# Altium PCB PATTERN-GENERATOR-NODE-PCB.PcbDoc (part 2 of 2)
Units mm, origin at the board's own origin, x right, y up, seen from the top; angles counter-clockwise.
Board outline 100.5 x 100.5 mm, 2 copper layers (Top Layer, Bottom Layer), stack 1.771 mm thick; 68 components, 36 nets, 239 pads, 2205 vias.
Unrouted connection lines stored in the file: 2.
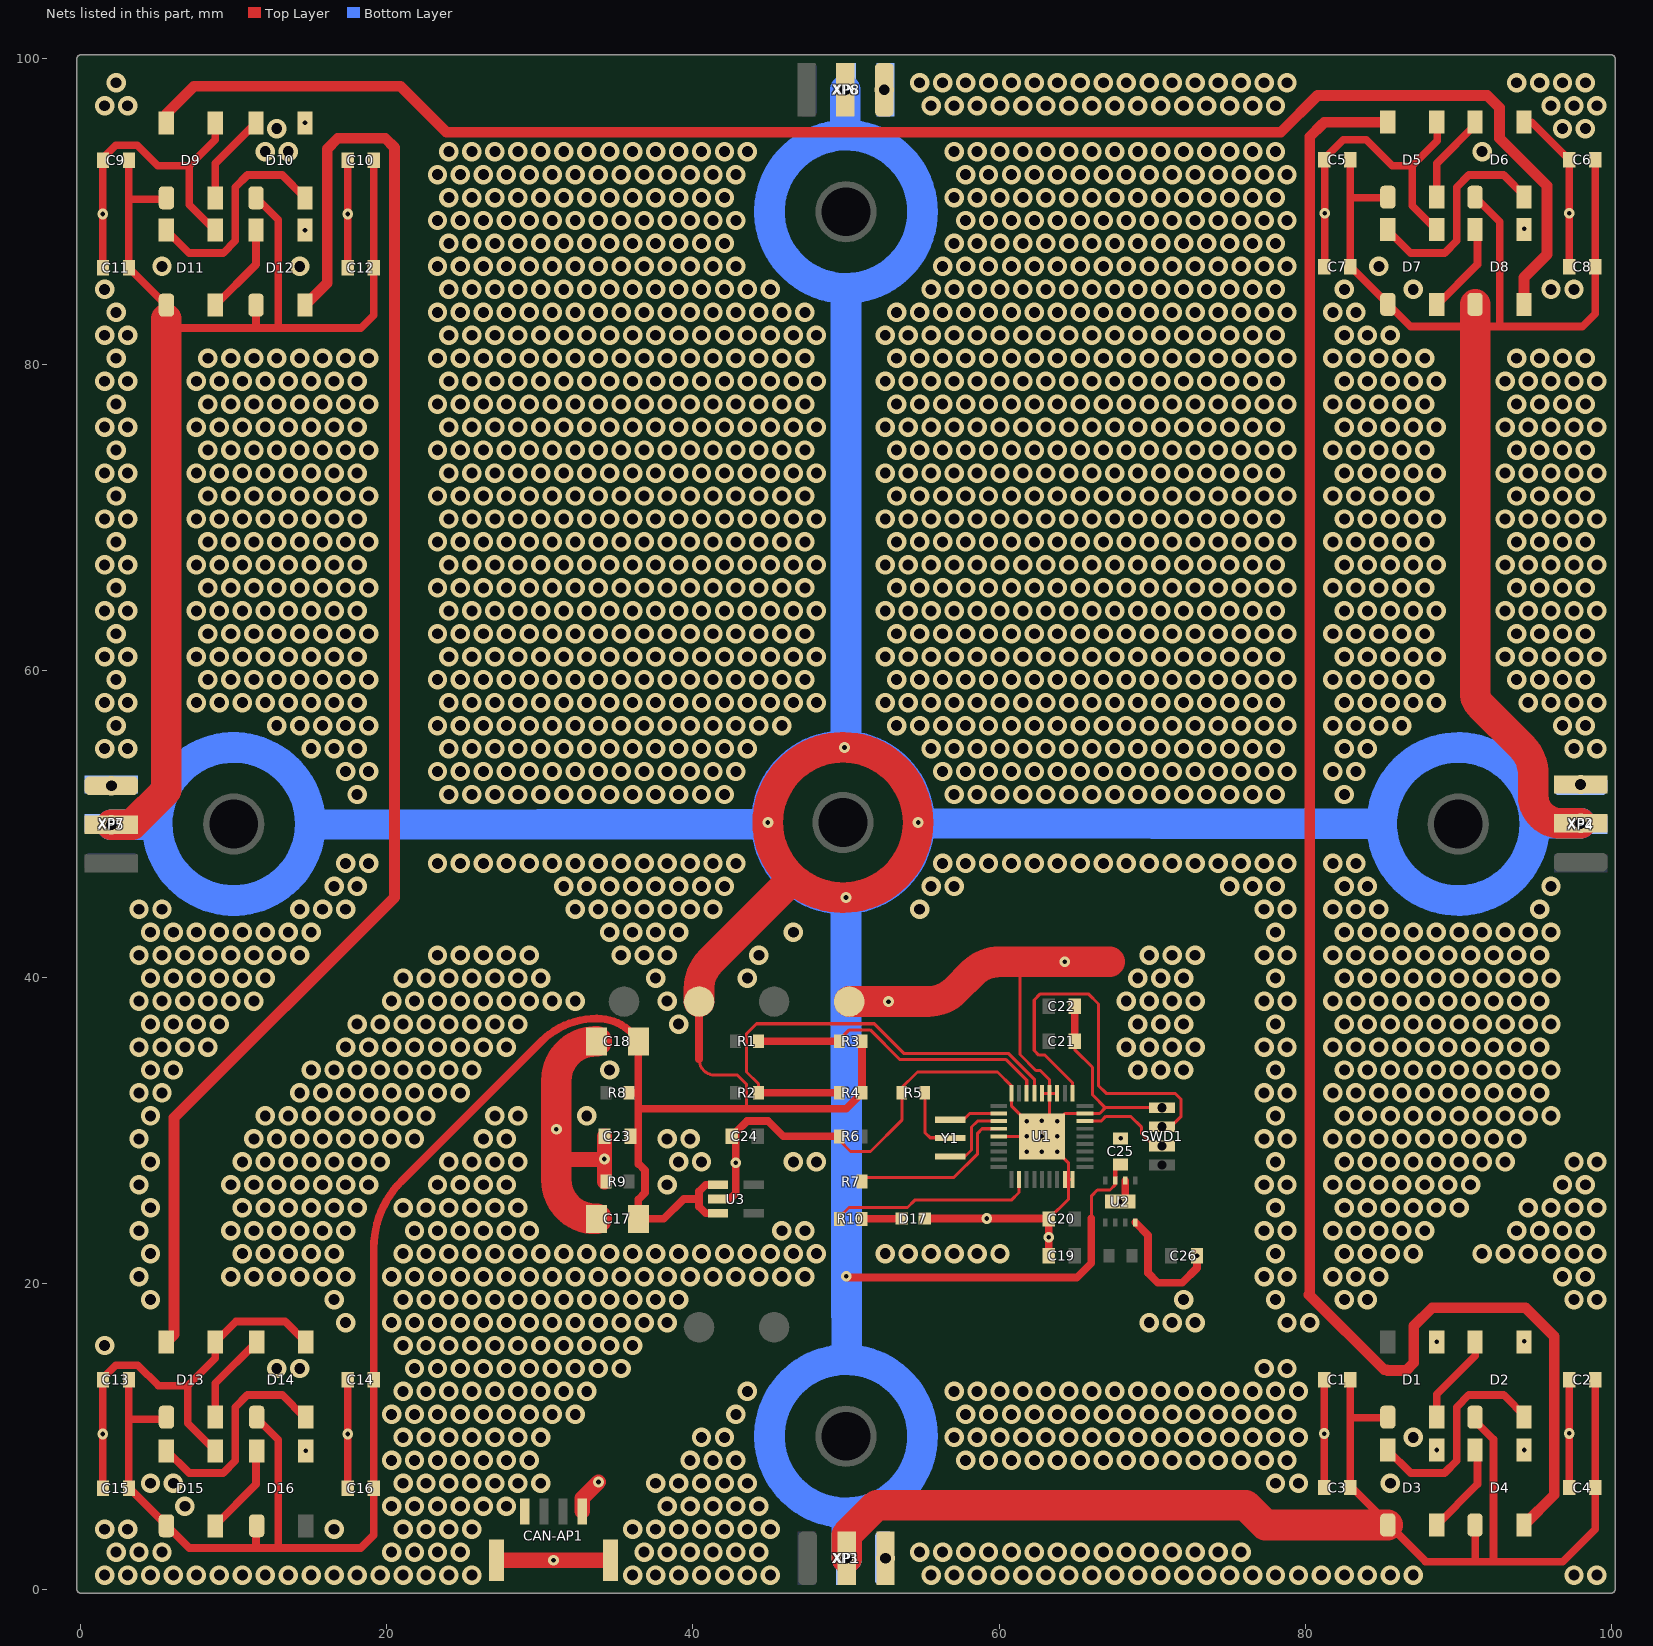
[diagram p2: the nets of this part, all layers, seen from the top]

## Via types
v1: diameter 1.27, hole 0.711, Top Layer to Bottom Layer, tented both sides, 2151 vias
v2: diameter 0.7, hole 0.3, Top Layer to Bottom Layer, tented top, 42 vias
v3: diameter 1.27, hole 0.711, Top Layer to Bottom Layer, tented top, 12 vias

## Nets (pads, with @x,y where several pads share a name; then routed paths per layer and width w, separated by ;. In a path a pad name is that pad's centre, name@x,y a point inside that pad or via, vN(x,y) a via of type N, cw(c..) or ccw(c..) an arc to the next point about the centre after c; other vN are vias at no path point) (continued)
GND: C1.2 C2.2 C3.2 C4.2 C5.2 C6.2 C7.2 C8.2 C9.2 C10.2 C11.2 C12.2 C13.2 C14.2 C15.2 C16.2 C17.1 C18.1 C19.2 C20.2 C21.2 C22.2 C23.2 C24.2 C25.2 C26.2 CAN-AP1.4 CAN-AP1.SH1 CAN-AP1.SH2 D1.3 D2.3 D3.3 D4.3 D5.3 D6.3 D7.3 D8.3 D9.3 D10.3 D11.3 D12.3 D13.3 D14.3 D15.3 D16.3 D17.C pad.9 R5.1 R6.1 R9.1 SWD1.1 U1. U1.5 U1.17 U1.18 U1.26 U1.30 U1.31 U1.32 U1.36 U2.2 U2.8 U2.P$9 U3.2 XP1.3 XP2.3 XP3.1 XP4.1 XP5.1 XP6.1 XP7.3 XP8.3 | length 253.3
  Top Layer w0.2: R6.1@49.55,29.59 49.55,29.35 50.3,28.6 51.6,28.6 53.65,30.65 R5.1@53.65,32.44 ; R5.1@53.529,32.661 54.668,33.8 59.9,33.8 U1.36@60.828,32.872 ; U1.5@59.985,29.59 v2(62.8,29.59) ; U1.36@60.825,32.405 60.825,31.565 v2(62.8,29.59) ; 61.364,41 61.364,34.936 62.4,33.9 62.7,33.9 63.3,33.3 U1.31@63.3,32.405 ; U1.32@62.8,32.405 U1.31@63.3,32.405 ; C20.2@63.25,24.2 64.55,25.5 64.55,26.775 ; U1.30@63.8,32.405 U1.31@63.3,32.405 ; U1.17@64.3,26.775 64.55,26.775 ; U1.18@64.8,26.775 64.55,26.775 ; C21.2@64.95,35.8 64.95,35.25 66.1,34.1 66.1,32.313 66.945,31.468 ; 66.848,31.468 70.647,31.468 SWD1.1@70.65,31.465 ; 66.946,31.468 66.568,31.09 U1.26@65.615,31.09 64.3,31.09 v2(63.8,30.59) U1.@63.3,30.09 ; v2(62.8,29.59) 64.55,27.84 64.55,26.775 ; v2(62.8,29.59) U1.@63.3,30.09 ; U1.@63.3,30.09 U1.31@63.3,32.405
  Top Layer w0.5: C15.2@1.45,6.6 v2(1.45,10.15) C13.2@1.45,13.7 1.45,13.8 2.3,14.65 3.736,14.65 5.086,13.3 7,13.3 ; C11.2@1.45,86.3 C11.2@1.45,86.35 C9.2@1.45,93.356 1.45,93.5 2.3,94.35 3.693,94.35 5.043,93 7.1,93 ; D15.3@8.8,9.05 7,10.85 7,13.3 ; D11.3@8.8,88.75 7.1,90.45 7.1,93 ; D9.3@8.8,95.85 D9.3@8.8,95.806 8.8,94.7 7.1,93 ; D14.3@14.7,16.15 13.35,17.5 10.15,17.5 D13.3@8.8,16.15 8.8,15.1 7,13.3 ; C16.2@17.45,6.6 v2(17.45,10.15) C14.2@17.45,13.7 ; C12.2@17.45,86.35 C10.2@17.45,93.356 ; U3.2@41.632,25.5 42.415,25.5 42.8,25.885 42.8,29.861 43.532,30.593 44.907,30.593 45.91,29.59 R6.1@49.55,29.59 ; D17.C@55.15,24.224 63.226,24.224 C20.2@63.25,24.2 v2(63.25,23) C19.2@63.25,21.8 ; C21.2@64.95,35.8 C22.2@64.95,38.1 ; v2(67.92,25.334) 68.245,25.659 U2.2@68.245,26.697 ; U2.8@68.895,23.972 69.73,23.137 69.73,20.67 70.37,20.03 71.97,20.03 72.932,20.992 v2(72.932,21.8) ; C3.2@81.25,6.65 v2(81.25,10.175) C1.2@81.25,13.7 ; C7.2@81.283,86.302 81.283,93.502 82.481,94.7 84,94.7 85.7,93 87,93 ; D7.3@88.633,88.752 87,90.385 87,93 ; D5.3@88.633,95.852 88.633,94.633 87,93 ; D6.3@94.3,95.85 94.8,95.85 C6.2@97.25,93.4 v2(97.25,89.9) C8.2@97.25,86.4 ; C2.2@97.249,13.714 v2(97.249,10.187) 97.249,6.659 C4.2@97.26,6.649
  Top Layer w1: CAN-AP1.SH1@27.165,1.895 CAN-AP1.SH2@34.615,1.895 CAN-AP1.SH2@34.615,2.193 ; 31.08,28.08 34.186,28.08 ccw(c34.186,28.113) v2(34.219,28.113) ; CAN-AP1.4@32.765,5.095 32.765,5.945 v2(33.83,7.01) ; C23.2@34.219,29.59 v2(34.219,28.113) ; R9.1@34.222,26.637 34.219,26.637 v2(34.219,28.113)
  Top Layer w2: C17.1@33.7,24.2 33.62,24.2 cw(c33.62,26.74) 31.08,26.74 31.08,28.08 31.08,33.26 cw(c33.62,33.26) 33.62,35.8 C18.1@33.7,35.8 ; pad.9@50.21,38.4 v2(52.779,38.4) 55.348,38.4 ccw(c55.348,40.94) 57.144,39.144 58.256,40.256 cw(c60.052,38.46) 60.052,41 61.364,41 67.22,41
  other v1: 1.561,0.928 3.061,0.928 4.561,0.928 6.061,0.928 7.561,0.928 9.061,0.928 10.561,0.928 12.061,0.928 13.561,0.928 15.061,0.928 16.561,0.928 18.061,0.928 19.561,0.928 21.061,0.928 22.561,0.928 24.061,0.928 25.561,0.928 36.061,0.928 37.561,0.928 39.061,0.928 40.561,0.928 42.061,0.928 43.561,0.928 45.061,0.928 55.561,0.928 57.061,0.928 58.561,0.928 60.061,0.928 61.561,0.928 63.061,0.928 64.561,0.928 66.061,0.928 67.561,0.928 69.061,0.928 70.561,0.928 72.061,0.928 73.561,0.928 75.061,0.928 76.561,0.928 78.061,0.928 79.561,0.928 81.061,0.928 82.561,0.928 84.061,0.928 85.561,0.928 87.061,0.928 97.561,0.928 99.061,0.928 2.311,2.428 3.811,2.428 5.311,2.428 20.311,2.428 21.811,2.428 23.311,2.428 24.811,2.428 36.811,2.428 38.311,2.428 39.811,2.428 41.311,2.428 42.811,2.428 44.311,2.428 54.811,2.428 56.311,2.428 57.811,2.428 59.311,2.428 60.811,2.428 62.311,2.428 63.811,2.428 65.311,2.428 66.811,2.428 68.311,2.428 69.811,2.428 71.311,2.428 72.811,2.428 74.311,2.428 75.811,2.428 1.561,3.928 3.061,3.928 16.561,3.928 21.061,3.928 22.561,3.928 24.061,3.928 25.561,3.928 36.061,3.928 37.561,3.928 39.061,3.928 40.561,3.928 42.061,3.928 43.561,3.928 45.061,3.928 6.811,5.428 20.311,5.428 21.811,5.428 23.311,5.428 24.811,5.428 26.311,5.428 27.811,5.428 38.311,5.428 39.811,5.428 41.311,5.428 42.811,5.428 44.311,5.428 4.561,6.928 6.061,6.928 21.061,6.928 22.561,6.928 24.061,6.928 25.561,6.928 27.061,6.928 28.561,6.928 30.061,6.928 37.561,6.928 39.061,6.928 40.561,6.928 42.061,6.928 43.561,6.928 78.061,6.928 79.561,6.928 85.561,6.928 20.311,8.428 21.811,8.428 23.311,8.428 24.811,8.428 26.311,8.428 27.811,8.428 29.311,8.428 39.811,8.428 41.311,8.428 42.811,8.428 57.811,8.428 59.311,8.428 60.811,8.428 62.311,8.428 63.811,8.428 65.311,8.428 66.811,8.428 68.311,8.428 69.811,8.428 71.311,8.428 72.811,8.428 74.311,8.428 75.811,8.428 77.311,8.428 78.811,8.428 21.061,9.928 22.561,9.928 24.061,9.928 25.561,9.928 27.061,9.928 28.561,9.928 30.061,9.928 40.561,9.928 42.061,9.928 57.061,9.928 58.561,9.928 60.061,9.928 61.561,9.928 63.061,9.928 64.561,9.928 66.061,9.928 67.561,9.928 69.061,9.928 70.561,9.928 72.061,9.928 73.561,9.928 75.061,9.928 76.561,9.928 78.061,9.928 79.561,9.928 87.061,9.928 20.311,11.428 21.811,11.428 23.311,11.428 24.811,11.428 26.311,11.428 27.811,11.428 29.311,11.428 30.811,11.428 32.311,11.428 42.811,11.428 57.811,11.428 59.311,11.428 60.811,11.428 62.311,11.428 63.811,11.428 65.311,11.428 66.811,11.428 68.311,11.428 69.811,11.428 71.311,11.428 72.811,11.428 74.311,11.428 75.811,11.428 77.311,11.428 78.811,11.428 21.061,12.928 22.561,12.928 24.061,12.928 25.561,12.928 27.061,12.928 28.561,12.928 30.061,12.928 31.561,12.928 33.061,12.928 43.561,12.928 57.061,12.928 58.561,12.928 60.061,12.928 61.561,12.928 63.061,12.928 64.561,12.928 66.061,12.928 67.561,12.928 69.061,12.928 70.561,12.928 72.061,12.928 73.561,12.928 75.061,12.928 76.561,12.928 78.061,12.928 79.561,12.928 12.811,14.428 14.311,14.428 21.811,14.428 23.311,14.428 24.811,14.428 26.311,14.428 27.811,14.428 29.311,14.428 30.811,14.428 32.311,14.428 33.811,14.428 35.311,14.428 77.311,14.428 78.811,14.428 1.561,15.928 21.061,15.928 22.561,15.928 24.061,15.928 25.561,15.928 27.061,15.928 28.561,15.928 30.061,15.928 31.561,15.928 33.061,15.928 34.561,15.928 36.061,15.928 17.311,17.428 20.311,17.428 21.811,17.428 23.311,17.428 24.811,17.428 26.311,17.428 27.811,17.428 29.311,17.428 30.811,17.428 32.311,17.428 33.811,17.428 35.311,17.428 36.811,17.428 38.311,17.428 69.811,17.428 71.311,17.428 72.811,17.428 78.811,17.428 80.311,17.428 4.561,18.928 16.561,18.928 21.061,18.928 22.561,18.928 24.061,18.928 25.561,18.928 27.061,18.928 28.561,18.928 30.061,18.928 31.561,18.928 33.061,18.928 34.561,18.928 36.061,18.928 37.561,18.928 39.061,18.928 72.061,18.928 78.061,18.928 82.561,18.928 84.061,18.928 97.561,18.928 99.061,18.928 3.811,20.428 9.811,20.428 11.311,20.428 12.811,20.428 14.311,20.428 15.811,20.428 17.311,20.428 20.311,20.428 21.811,20.428 23.311,20.428 24.811,20.428 26.311,20.428 27.811,20.428 29.311,20.428 30.811,20.428 32.311,20.428 33.811,20.428 35.311,20.428 36.811,20.428 38.311,20.428 39.811,20.428 41.311,20.428 42.811,20.428 44.311,20.428 45.811,20.428 47.311,20.428 77.311,20.428 78.811,20.428 81.811,20.428 83.311,20.428 84.811,20.428 96.811,20.428 98.311,20.428 4.561,21.928 10.561,21.928 12.061,21.928 13.561,21.928 15.061,21.928 16.561,21.928 21.061,21.928 22.561,21.928 24.061,21.928 25.561,21.928 27.061,21.928 28.561,21.928 30.061,21.928 31.561,21.928 33.061,21.928 34.561,21.928 36.061,21.928 37.561,21.928 39.061,21.928 40.561,21.928 42.061,21.928 43.561,21.928 45.061,21.928 46.561,21.928 48.061,21.928 52.561,21.928 54.061,21.928 55.561,21.928 57.061,21.928 58.561,21.928 60.061,21.928 78.061,21.928 82.561,21.928 84.061,21.928 85.561,21.928 87.061,21.928 91.561,21.928 93.061,21.928 94.561,21.928 96.061,21.928 97.561,21.928 99.061,21.928 3.811,23.428 9.811,23.428 11.311,23.428 12.811,23.428 14.311,23.428 15.811,23.428 17.311,23.428 21.811,23.428 23.311,23.428 24.811,23.428 26.311,23.428 27.811,23.428 29.311,23.428 45.811,23.428 47.311,23.428 77.311,23.428 78.811,23.428 81.811,23.428 83.311,23.428 84.811,23.428 86.311,23.428 87.811,23.428 93.811,23.428 95.311,23.428 96.811,23.428 98.311,23.428 4.561,24.928 10.561,24.928 12.061,24.928 13.561,24.928 15.061,24.928 16.561,24.928 18.061,24.928 21.061,24.928 22.561,24.928 24.061,24.928 25.561,24.928 27.061,24.928 28.561,24.928 78.061,24.928 82.561,24.928 84.061,24.928 85.561,24.928 87.061,24.928 88.561,24.928 90.061,24.928 94.561,24.928 96.061,24.928 97.561,24.928 99.061,24.928 3.811,26.428 9.811,26.428 11.311,26.428 12.811,26.428 14.311,26.428 15.811,26.428 17.311,26.428 18.811,26.428 23.311,26.428 24.811,26.428 26.311,26.428 27.811,26.428 38.311,26.428 77.311,26.428 78.811,26.428 81.811,26.428 83.311,26.428 84.811,26.428 86.311,26.428 87.811,26.428 89.311,26.428 90.811,26.428 96.811,26.428 98.311,26.428 4.561,27.928 10.561,27.928 12.061,27.928 13.561,27.928 15.061,27.928 16.561,27.928 18.061,27.928 19.561,27.928 24.061,27.928 25.561,27.928 27.061,27.928 28.561,27.928 39.061,27.928 40.561,27.928 46.561,27.928 48.061,27.928 78.061,27.928 82.561,27.928 84.061,27.928 85.561,27.928 87.061,27.928 88.561,27.928 90.061,27.928 91.561,27.928 93.061,27.928 97.561,27.928 99.061,27.928 3.811,29.428 11.311,29.428 12.811,29.428 14.311,29.428 15.811,29.428 17.311,29.428 18.811,29.428 20.311,29.428 21.811,29.428 26.311,29.428 27.811,29.428 38.311,29.428 39.811,29.428 77.311,29.428 78.811,29.428 81.811,29.428 83.311,29.428 84.811,29.428 86.311,29.428 87.811,29.428 89.311,29.428 90.811,29.428 92.311,29.428 93.811,29.428 4.561,30.928 12.061,30.928 13.561,30.928 15.061,30.928 16.561,30.928 18.061,30.928 19.561,30.928 21.061,30.928 22.561,30.928 27.061,30.928 28.561,30.928 33.061,30.928 78.061,30.928 82.561,30.928 84.061,30.928 85.561,30.928 87.061,30.928 88.561,30.928 90.061,30.928 91.561,30.928 93.061,30.928 94.561,30.928 96.061,30.928 3.811,32.428 5.311,32.428 14.311,32.428 15.811,32.428 17.311,32.428 18.811,32.428 20.311,32.428 21.811,32.428 23.311,32.428 24.811,32.428 77.311,32.428 78.811,32.428 81.811,32.428 83.311,32.428 84.811,32.428 86.311,32.428 87.811,32.428 89.311,32.428 90.811,32.428 92.311,32.428 93.811,32.428 95.311,32.428 4.561,33.928 6.061,33.928 15.061,33.928 16.561,33.928 18.061,33.928 19.561,33.928 21.061,33.928 22.561,33.928 24.061,33.928 25.561,33.928 34.561,33.928 69.061,33.928 70.561,33.928 72.061,33.928 78.061,33.928 82.561,33.928 84.061,33.928 85.561,33.928 87.061,33.928 88.561,33.928 90.061,33.928 91.561,33.928 93.061,33.928 94.561,33.928 96.061,33.928 3.811,35.428 5.311,35.428 6.811,35.428 8.311,35.428 17.311,35.428 18.811,35.428 20.311,35.428 21.811,35.428 23.311,35.428 24.811,35.428 26.311,35.428 27.811,35.428 68.311,35.428 69.811,35.428 71.311,35.428 72.811,35.428 77.311,35.428 78.811,35.428 81.811,35.428 83.311,35.428 84.811,35.428 86.311,35.428 87.811,35.428 89.311,35.428 90.811,35.428 92.311,35.428 93.811,35.428 95.311,35.428 4.561,36.928 6.061,36.928 7.561,36.928 9.061,36.928 18.061,36.928 19.561,36.928 21.061,36.928 22.561,36.928 24.061,36.928 25.561,36.928 27.061,36.928 28.561,36.928 39.061,36.928 69.061,36.928 70.561,36.928 72.061,36.928 78.061,36.928 82.561,36.928 84.061,36.928 85.561,36.928 87.061,36.928 88.561,36.928 90.061,36.928 91.561,36.928 93.061,36.928 94.561,36.928 96.061,36.928 3.811,38.428 5.311,38.428 6.811,38.428 8.311,38.428 9.811,38.428 11.311,38.428 20.311,38.428 21.811,38.428 23.311,38.428 24.811,38.428 26.311,38.428 27.811,38.428 29.311,38.428 30.811,38.428 32.311,38.428 38.311,38.428 68.311,38.428 69.811,38.428 71.311,38.428 72.811,38.428 77.311,38.428 78.811,38.428 81.811,38.428 83.311,38.428 84.811,38.428 86.311,38.428 87.811,38.428 89.311,38.428 90.811,38.428 92.311,38.428 93.811,38.428 95.311,38.428 4.561,39.928 6.061,39.928 7.561,39.928 9.061,39.928 10.561,39.928 12.061,39.928 21.061,39.928 22.561,39.928 24.061,39.928 25.561,39.928 27.061,39.928 28.561,39.928 30.061,39.928 37.561,39.928 43.561,39.928 69.061,39.928 70.561,39.928 72.061,39.928 78.061,39.928 82.561,39.928 84.061,39.928 85.561,39.928 87.061,39.928 88.561,39.928 90.061,39.928 91.561,39.928 93.061,39.928 94.561,39.928 96.061,39.928 3.811,41.428 5.311,41.428 6.811,41.428 8.311,41.428 9.811,41.428 11.311,41.428 12.811,41.428 14.311,41.428 23.311,41.428 24.811,41.428 26.311,41.428 27.811,41.428 29.311,41.428 35.311,41.428 36.811,41.428 38.311,41.428 44.311,41.428 69.811,41.428 71.311,41.428 72.811,41.428 77.311,41.428 78.811,41.428 81.811,41.428 83.311,41.428 84.811,41.428 86.311,41.428 87.811,41.428 89.311,41.428 90.811,41.428 92.311,41.428 93.811,41.428 95.311,41.428 4.561,42.928 6.061,42.928 7.561,42.928 9.061,42.928 10.561,42.928 12.061,42.928 13.561,42.928 15.061,42.928 34.561,42.928 36.061,42.928 37.561,42.928 39.061,42.928 46.561,42.928 78.061,42.928 82.561,42.928 84.061,42.928 85.561,42.928 87.061,42.928 88.561,42.928 90.061,42.928 91.561,42.928 93.061,42.928 94.561,42.928 96.061,42.928 3.811,44.428 5.311,44.428 14.311,44.428 15.811,44.428 17.311,44.428 32.311,44.428 33.811,44.428 35.311,44.428 36.811,44.428 38.311,44.428 39.811,44.428 41.311,44.428 54.811,44.428 77.311,44.428 78.811,44.428 81.811,44.428 83.311,44.428 84.811,44.428 95.311,44.428 16.561,45.928 18.061,45.928 31.561,45.928 33.061,45.928 34.561,45.928 36.061,45.928 37.561,45.928 39.061,45.928 40.561,45.928 42.061,45.928 55.561,45.928 57.061,45.928 75.061,45.928 76.561,45.928 78.061,45.928 82.561,45.928 84.061,45.928 96.061,45.928 17.311,47.428 18.811,47.428 23.311,47.428 24.811,47.428 26.311,47.428 27.811,47.428 29.311,47.428 30.811,47.428 32.311,47.428 33.811,47.428 35.311,47.428 36.811,47.428 38.311,47.428 39.811,47.428 41.311,47.428 42.811,47.428 56.311,47.428 57.811,47.428 59.311,47.428 60.811,47.428 62.311,47.428 63.811,47.428 65.311,47.428 66.811,47.428 68.311,47.428 69.811,47.428 71.311,47.428 72.811,47.428 74.311,47.428 75.811,47.428 77.311,47.428 78.811,47.428 81.811,47.428 83.311,47.428 18.061,51.928 24.061,51.928 25.561,51.928 27.061,51.928 28.561,51.928 30.061,51.928 31.561,51.928 33.061,51.928 34.561,51.928 36.061,51.928 37.561,51.928 39.061,51.928 40.561,51.928 42.061,51.928 57.061,51.928 58.561,51.928 60.061,51.928 61.561,51.928 63.061,51.928 64.561,51.928 66.061,51.928 67.561,51.928 69.061,51.928 70.561,51.928 72.061,51.928 73.561,51.928 75.061,51.928 76.561,51.928 78.061,51.928 82.561,51.928 17.311,53.428 18.811,53.428 23.311,53.428 24.811,53.428 26.311,53.428 27.811,53.428 29.311,53.428 30.811,53.428 32.311,53.428 33.811,53.428 35.311,53.428 36.811,53.428 38.311,53.428 39.811,53.428 41.311,53.428 42.811,53.428 56.311,53.428 57.811,53.428 59.311,53.428 60.811,53.428 62.311,53.428 63.811,53.428 65.311,53.428 66.811,53.428 68.311,53.428 69.811,53.428 71.311,53.428 72.811,53.428 74.311,53.428 75.811,53.428 77.311,53.428 78.811,53.428 81.811,53.428 83.311,53.428 1.561,54.928 3.061,54.928 15.061,54.928 16.561,54.928 18.061,54.928 24.061,54.928 25.561,54.928 27.061,54.928 28.561,54.928 30.061,54.928 31.561,54.928 33.061,54.928 34.561,54.928 36.061,54.928 37.561,54.928 39.061,54.928 40.561,54.928 42.061,54.928 43.561,54.928 55.561,54.928 57.061,54.928 58.561,54.928 60.061,54.928 61.561,54.928 63.061,54.928 64.561,54.928 66.061,54.928 67.561,54.928 69.061,54.928 70.561,54.928 72.061,54.928 73.561,54.928 75.061,54.928 76.561,54.928 78.061,54.928 82.561,54.928 84.061,54.928 97.561,54.928 99.061,54.928 2.311,56.428 12.811,56.428 14.311,56.428 15.811,56.428 17.311,56.428 18.811,56.428 23.311,56.428 24.811,56.428 26.311,56.428 27.811,56.428 29.311,56.428 30.811,56.428 32.311,56.428 33.811,56.428 35.311,56.428 36.811,56.428 38.311,56.428 39.811,56.428 41.311,56.428 42.811,56.428 44.311,56.428 45.811,56.428 53.311,56.428 54.811,56.428 56.311,56.428 57.811,56.428 59.311,56.428 60.811,56.428 62.311,56.428 63.811,56.428 65.311,56.428 66.811,56.428 68.311,56.428 69.811,56.428 71.311,56.428 72.811,56.428 74.311,56.428 75.811,56.428 77.311,56.428 78.811,56.428 81.811,56.428 83.311,56.428 84.811,56.428 86.311,56.428 96.811,56.428 98.311,56.428 1.561,57.928 3.061,57.928 7.561,57.928 9.061,57.928 10.561,57.928 12.061,57.928 13.561,57.928 15.061,57.928 16.561,57.928 18.061,57.928 24.061,57.928 25.561,57.928 27.061,57.928 28.561,57.928 30.061,57.928 31.561,57.928 33.061,57.928 34.561,57.928 36.061,57.928 37.561,57.928 39.061,57.928 40.561,57.928 42.061,57.928 43.561,57.928 45.061,57.928 46.561,57.928 48.061,57.928 52.561,57.928 54.061,57.928 55.561,57.928 57.061,57.928 58.561,57.928 60.061,57.928 61.561,57.928 63.061,57.928 64.561,57.928 66.061,57.928 67.561,57.928 69.061,57.928 70.561,57.928 72.061,57.928 73.561,57.928 75.061,57.928 76.561,57.928 78.061,57.928 82.561,57.928 84.061,57.928 85.561,57.928 87.061,57.928 88.561,57.928 94.561,57.928 96.061,57.928 97.561,57.928 99.061,57.928 2.311,59.428 8.311,59.428 9.811,59.428 11.311,59.428 12.811,59.428 14.311,59.428 15.811,59.428 17.311,59.428 18.811,59.428 23.311,59.428 24.811,59.428 26.311,59.428 27.811,59.428 29.311,59.428 30.811,59.428 32.311,59.428 33.811,59.428 35.311,59.428 36.811,59.428 38.311,59.428 39.811,59.428 41.311,59.428 42.811,59.428 44.311,59.428 45.811,59.428 47.311,59.428 53.311,59.428 54.811,59.428 56.311,59.428 57.811,59.428 59.311,59.428 60.811,59.428 62.311,59.428 63.811,59.428 65.311,59.428 66.811,59.428 68.311,59.428 69.811,59.428 71.311,59.428 72.811,59.428 74.311,59.428 75.811,59.428 77.311,59.428 78.811,59.428 81.811,59.428 83.311,59.428 84.811,59.428 86.311,59.428 87.811,59.428 93.811,59.428 95.311,59.428 96.811,59.428 98.311,59.428 1.561,60.928 3.061,60.928 7.561,60.928 9.061,60.928 10.561,60.928 12.061,60.928 13.561,60.928 15.061,60.928 16.561,60.928 18.061,60.928 24.061,60.928 25.561,60.928 27.061,60.928 28.561,60.928 30.061,60.928 31.561,60.928 33.061,60.928 34.561,60.928 36.061,60.928 37.561,60.928 39.061,60.928 40.561,60.928 42.061,60.928 43.561,60.928 45.061,60.928 46.561,60.928 48.061,60.928 52.561,60.928 54.061,60.928 55.561,60.928 57.061,60.928 58.561,60.928 60.061,60.928 61.561,60.928 63.061,60.928 64.561,60.928 66.061,60.928 67.561,60.928 69.061,60.928 70.561,60.928 72.061,60.928 73.561,60.928 75.061,60.928 76.561,60.928 78.061,60.928 82.561,60.928 84.061,60.928 85.561,60.928 87.061,60.928 88.561,60.928 93.061,60.928 94.561,60.928 96.061,60.928 97.561,60.928 99.061,60.928 2.311,62.428 8.311,62.428 9.811,62.428 11.311,62.428 12.811,62.428 14.311,62.428 15.811,62.428 17.311,62.428 18.811,62.428 23.311,62.428 24.811,62.428 26.311,62.428 27.811,62.428 29.311,62.428 30.811,62.428 32.311,62.428 33.811,62.428 35.311,62.428 36.811,62.428 38.311,62.428 39.811,62.428 41.311,62.428 42.811,62.428 44.311,62.428 45.811,62.428 47.311,62.428 53.311,62.428 54.811,62.428 56.311,62.428 57.811,62.428 59.311,62.428 60.811,62.428 62.311,62.428 63.811,62.428 65.311,62.428 66.811,62.428 68.311,62.428 69.811,62.428 71.311,62.428 72.811,62.428 74.311,62.428 75.811,62.428 77.311,62.428 78.811,62.428 81.811,62.428 83.311,62.428 84.811,62.428 86.311,62.428 87.811,62.428 93.811,62.428 95.311,62.428 96.811,62.428 98.311,62.428 1.561,63.928 3.061,63.928 7.561,63.928 9.061,63.928 10.561,63.928 12.061,63.928 13.561,63.928 15.061,63.928 16.561,63.928 18.061,63.928 24.061,63.928 25.561,63.928 27.061,63.928 28.561,63.928 30.061,63.928 31.561,63.928 33.061,63.928 34.561,63.928 36.061,63.928 37.561,63.928 39.061,63.928 40.561,63.928 42.061,63.928 43.561,63.928 45.061,63.928 46.561,63.928 48.061,63.928 52.561,63.928 54.061,63.928 55.561,63.928 57.061,63.928 58.561,63.928 60.061,63.928 61.561,63.928 63.061,63.928 64.561,63.928 66.061,63.928 67.561,63.928 69.061,63.928 70.561,63.928 72.061,63.928 73.561,63.928 75.061,63.928 76.561,63.928 78.061,63.928 82.561,63.928 84.061,63.928 85.561,63.928 87.061,63.928 88.561,63.928 93.061,63.928 94.561,63.928 96.061,63.928 97.561,63.928 99.061,63.928 2.311,65.428 8.311,65.428 9.811,65.428 11.311,65.428 12.811,65.428 14.311,65.428 15.811,65.428 17.311,65.428 18.811,65.428 23.311,65.428 24.811,65.428 26.311,65.428 27.811,65.428 29.311,65.428 30.811,65.428 32.311,65.428 33.811,65.428 35.311,65.428 36.811,65.428 38.311,65.428 39.811,65.428 41.311,65.428 42.811,65.428 44.311,65.428 45.811,65.428 47.311,65.428 53.311,65.428 54.811,65.428 56.311,65.428 57.811,65.428 59.311,65.428 60.811,65.428 62.311,65.428 63.811,65.428 65.311,65.428 66.811,65.428 68.311,65.428 69.811,65.428 71.311,65.428 72.811,65.428 74.311,65.428 75.811,65.428 77.311,65.428 78.811,65.428 81.811,65.428 83.311,65.428 84.811,65.428 86.311,65.428 87.811,65.428 93.811,65.428 95.311,65.428 96.811,65.428 98.311,65.428 1.561,66.928 3.061,66.928 7.561,66.928 9.061,66.928 10.561,66.928 12.061,66.928 13.561,66.928 15.061,66.928 16.561,66.928 18.061,66.928 24.061,66.928 25.561,66.928 27.061,66.928 28.561,66.928 30.061,66.928 31.561,66.928 33.061,66.928 34.561,66.928 36.061,66.928 37.561,66.928 39.061,66.928 40.561,66.928 42.061,66.928 43.561,66.928 45.061,66.928 46.561,66.928 48.061,66.928 52.561,66.928 54.061,66.928 55.561,66.928 57.061,66.928 58.561,66.928 60.061,66.928 61.561,66.928 63.061,66.928 64.561,66.928 66.061,66.928 67.561,66.928 69.061,66.928 70.561,66.928 72.061,66.928 73.561,66.928 75.061,66.928 76.561,66.928 78.061,66.928 82.561,66.928 84.061,66.928 85.561,66.928 87.061,66.928 88.561,66.928 93.061,66.928 94.561,66.928 96.061,66.928 97.561,66.928 99.061,66.928 2.311,68.428 8.311,68.428 9.811,68.428 11.311,68.428 12.811,68.428 14.311,68.428 15.811,68.428 17.311,68.428 18.811,68.428 23.311,68.428 24.811,68.428 26.311,68.428 27.811,68.428 29.311,68.428 30.811,68.428 32.311,68.428 33.811,68.428 35.311,68.428 36.811,68.428 38.311,68.428 39.811,68.428 41.311,68.428 42.811,68.428 44.311,68.428 45.811,68.428 47.311,68.428 53.311,68.428 54.811,68.428 56.311,68.428 57.811,68.428 59.311,68.428 60.811,68.428 62.311,68.428 63.811,68.428 65.311,68.428 66.811,68.428 68.311,68.428 69.811,68.428 71.311,68.428 72.811,68.428 74.311,68.428 75.811,68.428 77.311,68.428 78.811,68.428 81.811,68.428 83.311,68.428 84.811,68.428 86.311,68.428 87.811,68.428 93.811,68.428 95.311,68.428 96.811,68.428 98.311,68.428 1.561,69.928 3.061,69.928 7.561,69.928 9.061,69.928 10.561,69.928 12.061,69.928 13.561,69.928 15.061,69.928 16.561,69.928 18.061,69.928 24.061,69.928 25.561,69.928 27.061,69.928 28.561,69.928 30.061,69.928 31.561,69.928 33.061,69.928 34.561,69.928 36.061,69.928 37.561,69.928 39.061,69.928 40.561,69.928 42.061,69.928 43.561,69.928 45.061,69.928 46.561,69.928 48.061,69.928 52.561,69.928 54.061,69.928 55.561,69.928 57.061,69.928 58.561,69.928 60.061,69.928 61.561,69.928 63.061,69.928 64.561,69.928 66.061,69.928 67.561,69.928 69.061,69.928 70.561,69.928 72.061,69.928 73.561,69.928 75.061,69.928 76.561,69.928 78.061,69.928 82.561,69.928 84.061,69.928 85.561,69.928 87.061,69.928 88.561,69.928 93.061,69.928 94.561,69.928 96.061,69.928 97.561,69.928 99.061,69.928 2.311,71.428 8.311,71.428 9.811,71.428 11.311,71.428 12.811,71.428 14.311,71.428 15.811,71.428 17.311,71.428 18.811,71.428 23.311,71.428 24.811,71.428 26.311,71.428 27.811,71.428 29.311,71.428 30.811,71.428 32.311,71.428 33.811,71.428 35.311,71.428 36.811,71.428 38.311,71.428 39.811,71.428 41.311,71.428 42.811,71.428 44.311,71.428 45.811,71.428 47.311,71.428 53.311,71.428 54.811,71.428 56.311,71.428 57.811,71.428 59.311,71.428 60.811,71.428 62.311,71.428 63.811,71.428 65.311,71.428 66.811,71.428 68.311,71.428 69.811,71.428 71.311,71.428 72.811,71.428 74.311,71.428 75.811,71.428 77.311,71.428 78.811,71.428 81.811,71.428 83.311,71.428 84.811,71.428 86.311,71.428 87.811,71.428 93.811,71.428 95.311,71.428 96.811,71.428 98.311,71.428 1.561,72.928 3.061,72.928 7.561,72.928 9.061,72.928 10.561,72.928 12.061,72.928 13.561,72.928 15.061,72.928 16.561,72.928 18.061,72.928 24.061,72.928 25.561,72.928 27.061,72.928 28.561,72.928 30.061,72.928 31.561,72.928 33.061,72.928 34.561,72.928 36.061,72.928 37.561,72.928 39.061,72.928 40.561,72.928 42.061,72.928 43.561,72.928 45.061,72.928 46.561,72.928 48.061,72.928 52.561,72.928 54.061,72.928 55.561,72.928 57.061,72.928 58.561,72.928 60.061,72.928 61.561,72.928 63.061,72.928 64.561,72.928 66.061,72.928 67.561,72.928 69.061,72.928 70.561,72.928 72.061,72.928 73.561,72.928 75.061,72.928 76.561,72.928 78.061,72.928 82.561,72.928 84.061,72.928 85.561,72.928 87.061,72.928 88.561,72.928 93.061,72.928 94.561,72.928 96.061,72.928 97.561,72.928 99.061,72.928 2.311,74.428 8.311,74.428 9.811,74.428 11.311,74.428 12.811,74.428 14.311,74.428 15.811,74.428 17.311,74.428 18.811,74.428 23.311,74.428 24.811,74.428 26.311,74.428 27.811,74.428 29.311,74.428 30.811,74.428 32.311,74.428 33.811,74.428 35.311,74.428 36.811,74.428 38.311,74.428 39.811,74.428 41.311,74.428 42.811,74.428 44.311,74.428 45.811,74.428 47.311,74.428 53.311,74.428 54.811,74.428 56.311,74.428 57.811,74.428 59.311,74.428 60.811,74.428 62.311,74.428 63.811,74.428 65.311,74.428 66.811,74.428 68.311,74.428 69.811,74.428 71.311,74.428 72.811,74.428 74.311,74.428 75.811,74.428 77.311,74.428 78.811,74.428 81.811,74.428 83.311,74.428 84.811,74.428 86.311,74.428 87.811,74.428 93.811,74.428 95.311,74.428 96.811,74.428 98.311,74.428 1.561,75.928 3.061,75.928 7.561,75.928 9.061,75.928 10.561,75.928 12.061,75.928 13.561,75.928 15.061,75.928 16.561,75.928 18.061,75.928 24.061,75.928 25.561,75.928 27.061,75.928 28.561,75.928 30.061,75.928 31.561,75.928 33.061,75.928 34.561,75.928 36.061,75.928 37.561,75.928 39.061,75.928 40.561,75.928 42.061,75.928 43.561,75.928 45.061,75.928 46.561,75.928 48.061,75.928 52.561,75.928 54.061,75.928 55.561,75.928 57.061,75.928 58.561,75.928 60.061,75.928 61.561,75.928 63.061,75.928 64.561,75.928 66.061,75.928 67.561,75.928 69.061,75.928 70.561,75.928 72.061,75.928 73.561,75.928 75.061,75.928 76.561,75.928 78.061,75.928 82.561,75.928 84.061,75.928 85.561,75.928 87.061,75.928 88.561,75.928 93.061,75.928 94.561,75.928 96.061,75.928 97.561,75.928 99.061,75.928 2.311,77.428 8.311,77.428 9.811,77.428 11.311,77.428 12.811,77.428 14.311,77.428 15.811,77.428 17.311,77.428 18.811,77.428 23.311,77.428 24.811,77.428 26.311,77.428 27.811,77.428 29.311,77.428 30.811,77.428 32.311,77.428 33.811,77.428 35.311,77.428 36.811,77.428 38.311,77.428 39.811,77.428 41.311,77.428 42.811,77.428 44.311,77.428 45.811,77.428 47.311,77.428 53.311,77.428 54.811,77.428 56.311,77.428 57.811,77.428 59.311,77.428 60.811,77.428 62.311,77.428 63.811,77.428 65.311,77.428 66.811,77.428 68.311,77.428 69.811,77.428 71.311,77.428 72.811,77.428 74.311,77.428 75.811,77.428 77.311,77.428 78.811,77.428 81.811,77.428 83.311,77.428 84.811,77.428 86.311,77.428 87.811,77.428 93.811,77.428 95.311,77.428 96.811,77.428 98.311,77.428 1.561,78.928 3.061,78.928 7.561,78.928 9.061,78.928 10.561,78.928 12.061,78.928 13.561,78.928 15.061,78.928 16.561,78.928 18.061,78.928 24.061,78.928 25.561,78.928 27.061,78.928 28.561,78.928 30.061,78.928 31.561,78.928 33.061,78.928 34.561,78.928 36.061,78.928 37.561,78.928 39.061,78.928 40.561,78.928 42.061,78.928 43.561,78.928 45.061,78.928 46.561,78.928 48.061,78.928 52.561,78.928 54.061,78.928 55.561,78.928 57.061,78.928 58.561,78.928 60.061,78.928 61.561,78.928 63.061,78.928 64.561,78.928 66.061,78.928 67.561,78.928 69.061,78.928 70.561,78.928 72.061,78.928 73.561,78.928 75.061,78.928 76.561,78.928 78.061,78.928 82.561,78.928 84.061,78.928 85.561,78.928 87.061,78.928 88.561,78.928 93.061,78.928 94.561,78.928 96.061,78.928 97.561,78.928 99.061,78.928 2.311,80.428 8.311,80.428 9.811,80.428 11.311,80.428 12.811,80.428 14.311,80.428 15.811,80.428 17.311,80.428 18.811,80.428 23.311,80.428 24.811,80.428 26.311,80.428 27.811,80.428 29.311,80.428 30.811,80.428 32.311,80.428 33.811,80.428 35.311,80.428 36.811,80.428 38.311,80.428 39.811,80.428 41.311,80.428 42.811,80.428 44.311,80.428 45.811,80.428 47.311,80.428 53.311,80.428 54.811,80.428 56.311,80.428 57.811,80.428 59.311,80.428 60.811,80.428 62.311,80.428 63.811,80.428 65.311,80.428 66.811,80.428 68.311,80.428 69.811,80.428 71.311,80.428 72.811,80.428 74.311,80.428 75.811,80.428 77.311,80.428 78.811,80.428 81.811,80.428 83.311,80.428 84.811,80.428 86.311,80.428 87.811,80.428 93.811,80.428 95.311,80.428 96.811,80.428 98.311,80.428 1.561,81.928 3.061,81.928 24.061,81.928 25.561,81.928 27.061,81.928 28.561,81.928 30.061,81.928 31.561,81.928 33.061,81.928 34.561,81.928 36.061,81.928 37.561,81.928 39.061,81.928 40.561,81.928 42.061,81.928 43.561,81.928 45.061,81.928 46.561,81.928 48.061,81.928 52.561,81.928 54.061,81.928 55.561,81.928 57.061,81.928 58.561,81.928 60.061,81.928 61.561,81.928 63.061,81.928 64.561,81.928 66.061,81.928 67.561,81.928 69.061,81.928 70.561,81.928 72.061,81.928 73.561,81.928 75.061,81.928 76.561,81.928 78.061,81.928 82.561,81.928 84.061,81.928 85.561,81.928 2.311,83.428 23.311,83.428 24.811,83.428 26.311,83.428 27.811,83.428 29.311,83.428 30.811,83.428 32.311,83.428 33.811,83.428 35.311,83.428 36.811,83.428 38.311,83.428 39.811,83.428 41.311,83.428 42.811,83.428 44.311,83.428 45.811,83.428 47.311,83.428 53.311,83.428 54.811,83.428 56.311,83.428 57.811,83.428 59.311,83.428 60.811,83.428 62.311,83.428 63.811,83.428 65.311,83.428 66.811,83.428 68.311,83.428 69.811,83.428 71.311,83.428 72.811,83.428 74.311,83.428 75.811,83.428 77.311,83.428 78.811,83.428 81.811,83.428 83.311,83.428 1.561,84.928 24.061,84.928 25.561,84.928 27.061,84.928 28.561,84.928 30.061,84.928 31.561,84.928 33.061,84.928 34.561,84.928 36.061,84.928 37.561,84.928 39.061,84.928 40.561,84.928 42.061,84.928 43.561,84.928 45.061,84.928 55.561,84.928 57.061,84.928 58.561,84.928 60.061,84.928 61.561,84.928 63.061,84.928 64.561,84.928 66.061,84.928 67.561,84.928 69.061,84.928 70.561,84.928 72.061,84.928 73.561,84.928 75.061,84.928 76.561,84.928 78.061,84.928 82.561,84.928 87.061,84.928 96.061,84.928 97.561,84.928 5.311,86.428 14.311,86.428 23.311,86.428 24.811,86.428 26.311,86.428 27.811,86.428 29.311,86.428 30.811,86.428 32.311,86.428 33.811,86.428 35.311,86.428 36.811,86.428 38.311,86.428 39.811,86.428 41.311,86.428 42.811,86.428 56.311,86.428 57.811,86.428 59.311,86.428 60.811,86.428 62.311,86.428 63.811,86.428 65.311,86.428 66.811,86.428 68.311,86.428 69.811,86.428 71.311,86.428 72.811,86.428 74.311,86.428 75.811,86.428 77.311,86.428 78.811,86.428 84.811,86.428 24.061,87.928 25.561,87.928 27.061,87.928 28.561,87.928 30.061,87.928 31.561,87.928 33.061,87.928 34.561,87.928 36.061,87.928 37.561,87.928 39.061,87.928 40.561,87.928 42.061,87.928 57.061,87.928 58.561,87.928 60.061,87.928 61.561,87.928 63.061,87.928 64.561,87.928 66.061,87.928 67.561,87.928 69.061,87.928 70.561,87.928 72.061,87.928 73.561,87.928 75.061,87.928 76.561,87.928 78.061,87.928 23.311,89.428 24.811,89.428 26.311,89.428 27.811,89.428 29.311,89.428 30.811,89.428 32.311,89.428 33.811,89.428 35.311,89.428 36.811,89.428 38.311,89.428 39.811,89.428 41.311,89.428 42.811,89.428 57.811,89.428 59.311,89.428 60.811,89.428 62.311,89.428 63.811,89.428 65.311,89.428 66.811,89.428 68.311,89.428 69.811,89.428 71.311,89.428 72.811,89.428 74.311,89.428 75.811,89.428 77.311,89.428 78.811,89.428 24.061,90.928 25.561,90.928 27.061,90.928 28.561,90.928 30.061,90.928 31.561,90.928 33.061,90.928 34.561,90.928 36.061,90.928 37.561,90.928 39.061,90.928 40.561,90.928 42.061,90.928 57.061,90.928 58.561,90.928 60.061,90.928 61.561,90.928 63.061,90.928 64.561,90.928 66.061,90.928 67.561,90.928 69.061,90.928 70.561,90.928 72.061,90.928 73.561,90.928 75.061,90.928 76.561,90.928 78.061,90.928 23.311,92.428 24.811,92.428 26.311,92.428 27.811,92.428 29.311,92.428 30.811,92.428 32.311,92.428 33.811,92.428 35.311,92.428 36.811,92.428 38.311,92.428 39.811,92.428 41.311,92.428 42.811,92.428 57.811,92.428 59.311,92.428 60.811,92.428 62.311,92.428 63.811,92.428 65.311,92.428 66.811,92.428 68.311,92.428 69.811,92.428 71.311,92.428 72.811,92.428 74.311,92.428 75.811,92.428 77.311,92.428 78.811,92.428 12.061,93.928 13.561,93.928 24.061,93.928 25.561,93.928 27.061,93.928 28.561,93.928 30.061,93.928 31.561,93.928 33.061,93.928 34.561,93.928 36.061,93.928 37.561,93.928 39.061,93.928 40.561,93.928 42.061,93.928 43.561,93.928 57.061,93.928 58.561,93.928 60.061,93.928 61.561,93.928 63.061,93.928 64.561,93.928 66.061,93.928 67.561,93.928 69.061,93.928 70.561,93.928 72.061,93.928 73.561,93.928 75.061,93.928 76.561,93.928 78.061,93.928 91.561,93.928 12.811,95.428 96.811,95.428 98.311,95.428 1.561,96.928 3.061,96.928 55.561,96.928 57.061,96.928 58.561,96.928 60.061,96.928 61.561,96.928 63.061,96.928 64.561,96.928 66.061,96.928 67.561,96.928 69.061,96.928 70.561,96.928 72.061,96.928 73.561,96.928 75.061,96.928 76.561,96.928 78.061,96.928 96.061,96.928 97.561,96.928 99.061,96.928 2.311,98.428 54.811,98.428 56.311,98.428 57.811,98.428 59.311,98.428 60.811,98.428 62.311,98.428 63.811,98.428 65.311,98.428 66.811,98.428 68.311,98.428 69.811,98.428 71.311,98.428 72.811,98.428 74.311,98.428 75.811,98.428 77.311,98.428 78.811,98.428 93.811,98.428 95.311,98.428 96.811,98.428 98.311,98.428
  other v2: 30.89,1.895 14.7,9.05 88.6,9.1 94.3,9.1 88.604,16.176 94.3,16.2 59.188,24.224 42.8,27.873 61.8,28.6 62.8,28.6 63.8,28.6 67.937,29.46 61.8,29.6 63.8,29.6 31.08,30.061 61.813,30.578 62.8,30.6 64.292,41 14.653,88.8 94.313,88.876 1.45,89.853 17.45,89.853 81.283,89.902 14.653,95.806
  other v3: 52.58,2.028 2.002,52.5 97.998,52.58 52.5,97.972
LED1: R10.1 U1.11 | length 13.4
  Top Layer w0.2: R10.1@49.55,24.2 49.55,24.3 50.194,24.944 50.57,24.944 50.576,24.95 51.524,24.95 54.016,24.95 54.486,25.421 60.802,25.421 61.3,25.919 U1.11@61.3,26.775
NetD1_2: D1.2 D2.4 | length 6
  Top Layer w0.5: D1.2@88.6,11.206 88.6,12.75 91.109,15.259 91.109,15.963 D2.4@91.253,16.106
NetD2_2: D2.2 D3.4 | length 14.5
  Top Layer w0.5: D3.4@85.4,9.1 86.9,7.6 89.1,7.6 89.9,8.4 89.9,11.9 90.7,12.7 92.959,12.7 D2.2@94.453,11.206
NetD3_2: D3.2 D4.4 | length 6
  Top Layer w0.5: D3.2@88.6,4.2 91.253,6.853 D4.4@91.253,9.1
NetD4_2: D4.2 D5.4 | length 116.1
  Top Layer w0.5: 85.264,14.336 85.336,14.336
  Top Layer w0.7: 80.25,19.25 85.164,14.336 ; 80.3,19.3 80.3,94.9 81.1,95.7 81.25,95.85 D5.4@85.4,95.85 ; 85.336,14.336 85.373,14.3 86.6,14.3 87.1,14.8 87.1,17.2 88.3,18.4 94.4,18.4 96.278,16.522 96.278,6.178 D4.2@94.3,4.2
NetD5_2: D5.2 D6.4 | length 6
  Top Layer w0.5: D5.2@88.6,90.906 88.6,93.153 D6.4@91.253,95.806
NetD6_2: D6.2 D7.4 | length 14.5
  Top Layer w0.5: D7.4@85.4,88.8 86.9,87.3 89.1,87.3 89.9,88.1 89.9,91.6 90.7,92.4 92.959,92.4 D6.2@94.453,90.906
NetD7_2: D7.2 D8.4 | length 6
  Top Layer w0.5: D7.2@88.6,83.9 91.253,86.553 D8.4@91.253,88.8
NetD8_2: D8.2 D9.4 | length 105.9
  Top Layer w0.7: D9.4@5.6,95.806 5.6,96.4 7.4,98.2 20.9,98.2 23.9,95.2 78.4,95.2 80.8,97.6 91.9,97.6 92.7,96.8 92.7,94.8 95.8,91.7 95.8,87.2 94.3,85.7 D8.2@94.3,83.8
NetD9_2: D9.2 D10.4 | length 6
  Top Layer w0.5: D9.2@8.8,90.906 8.8,93.153 D10.4@11.453,95.806
NetD10_2: D10.2 D11.4 | length 14.5
  Top Layer w0.5: D11.4@5.6,88.8 7.1,87.3 9.3,87.3 10.1,88.1 10.1,91.6 10.9,92.4 13.159,92.4 D10.2@14.653,90.906
NetD11_2: D11.2 D12.4 | length 6
  Top Layer w0.5: D11.2@8.8,83.9 11.453,86.553 D12.4@11.453,88.8
NetD12_2: D12.2 D13.4 | length 100
  Top Layer w0.7: D13.4@5.6,16.15 6.1,16.65 6.1,30.8 20.5,45.2 20.5,94.2 19.9,94.8 16.8,94.8 16.1,94.1 16.1,85.347 D12.2@14.653,83.9
NetD13_2: D13.2 D14.4 | length 6
  Top Layer w0.5: D13.2@8.8,11.206 8.8,13.453 D14.4@11.453,16.106
NetD14_2: D14.2 D15.4 | length 14.5
  Top Layer w0.5: D15.4@5.6,9.1 7.1,7.6 9.3,7.6 10.1,8.4 10.1,11.9 10.9,12.7 13.159,12.7 D14.2@14.653,11.206
NetD15_2: D15.2 D16.4 | length 6
  Top Layer w0.5: D15.2@8.8,4.2 11.453,6.853 D16.4@11.453,9.1
NetD17_A: D17.A R10.2 | length 2.6
  Top Layer w0.5: R10.2@51.05,24.2 53.626,24.2 D17.A@53.65,24.224
NetR5_2: R5.2 Y1.2 | length 4.4
  Top Layer w0.2: R5.2@55.15,32.44 55.15,29.85 55.5,29.5 56.777,29.5 Y1.2@56.8,29.477
NetU1_2: U1.2 Y1.1 | length 3.4
  Top Layer w0.2: Y1.1@56.8,30.677 57.677,30.677 58.1,31.1 59.975,31.1 U1.2@59.985,31.09
NetU1_3: U1.3 Y1.3 | length 5
  Top Layer w0.2: Y1.3@56.8,28.277 57.777,28.277 58.2,28.7 58.2,30.2 58.59,30.59 U1.3@59.985,30.59
NRST: R7.2 U1.4 | length 11.2
  Top Layer w0.2: R7.2@51.05,26.64 51.31,26.9 57.048,26.9 58.6,28.452 58.6,29.8 58.89,30.09 U1.4@59.985,30.09
SCL/A2: R2.1 R4.1 U1.33 | length 30.6
  Top Layer w0.2: R2.1@44.279,32.44 44.279,33.021 43.5,33.8 43.5,36.3 44.15,36.95 51.85,36.95 53.8,35 60.631,35 62.301,33.33 U1.33@62.301,32.777
  Top Layer w0.5: R2.1@44.279,32.44 R4.1@49.55,32.44
SDA/A1: R1.1 R3.1 U1.34 | length 19.7
  Top Layer w0.2: R3.1@49.55,35.8 49.55,35.879 50.221,36.55 51.579,36.55 53.529,34.6 60.466,34.6 61.808,33.258 U1.34@61.808,32.763
  Top Layer w0.5: R1.1@44.279,35.8 R3.1@49.55,35.8
SWDIO: SWD1.3 U1.25 | length 6.2
  Top Layer w0.2: U1.25@65.615,30.59 66.665,30.59 66.977,30.902 68.591,30.902 69.314,30.179 69.314,29.768 70.117,28.965 SWD1.3@70.65,28.965
SWLK: SWD1.2 U1.28 | length 25.7
  Top Layer w0.2: U1.28@64.8,32.405 64.8,33.1 63,34.9 62.6,34.9 62.3,35.2 62.3,38.5 62.7,38.9 65.834,38.9 66.5,38.234 66.5,32.9 67,32.4 71.5,32.4 71.9,32 71.9,30.9 71.215,30.215 SWD1.2@70.65,30.215
VCC: C1.1 C2.1 C3.1 C4.1 C5.1 C6.1 C7.1 C8.1 C9.1 C10.1 C11.1 C12.1 C13.1 C14.1 C15.1 C16.1 C17.2 C18.2 C23.1 C25.1 CAN-AP1.1 D1.1 D2.1 D3.1 D4.1 D5.1 D6.1 D7.1 D8.1 D9.1 D10.1 D11.1 D12.1 D13.1 D14.1 D15.1 D16.1 pad.8 R3.2 R4.2 R8.2 U2.3 U3.1 U3.3 XP1.2 XP2.2 XP3.2 XP4.2 XP5.2 XP6.2 XP7.2 XP8.2 | length 740.3
  Top Layer w0.2: 40.4,34.624 ccw(c41.424,34.624) 41.424,33.6 42.9,33.6 43.5,33 43.5,31.4 ; 66.025,24.245 66.025,25.689 66.42,26.084 67.245,26.084 67.595,26.434 U2.3@67.595,26.697
  Top Layer w0.3: U2.3@67.595,26.697 67.595,27.418 C25.1@67.937,27.76
  Top Layer w0.5: C15.1@3.15,6.55 C15.1@3.15,6.6 3.15,11.1 ; C13.1@3.15,13.556 3.15,11.1 ; C11.1@3.15,86.25 C11.1@3.15,86.35 3.15,90.8 ; C9.1@3.15,93.256 3.15,90.8 ; C15.1@3.175,6.587 3.213,6.587 7.1,2.7 11.5,2.7 ; C11.1@3.175,86.287 3.213,86.287 D11.1@5.6,83.9 5.6,83 6.2,82.4 11.5,82.4 ; D13.1@5.6,11.106 3.156,11.106 3.15,11.1 ; D9.1@5.6,90.806 3.156,90.806 3.15,90.8 ; D16.1@11.453,4.2 11.453,2.747 11.5,2.7 ; D12.1@11.453,83.9 11.453,82.447 11.5,82.4 ; D10.1@11.453,90.906 11.471,90.906 12.9,89.477 12.9,82.4 ; D14.1@11.471,11.206 12.9,9.777 12.9,2.7 ; C14.1@19.15,13.556 C16.1@19.15,6.6 19.15,3.55 18.3,2.7 12.9,2.7 ; C14.1@19.15,13.7 19.15,22.314 cw(c25.273,22.314) 20.944,26.644 30.09,35.79 cw(c33.726,32.155) 33.726,37.296 cw(c33.726,34.087) 35.994,36.356 36.412,36.024 C18.2@36.438,35.8 36.438,32.5 ; C12.1@19.15,86.25 C12.1@19.15,86.35 C10.1@19.15,93.256 ; C12.1@19.15,86.3 19.15,83.25 18.3,82.4 12.9,82.4 ; R8.2@35.819,32.44 36.378,32.44 36.438,32.5 ; C23.1@35.919,29.59 36.328,29.59 36.438,29.7 ; pad.8@40.399,38.4 40.4,38.399 40.4,34.624 ; U3.3@41.632,24.56 40.84,24.56 40.4,25 40.4,25.5 ; U3.1@41.632,26.44 40.84,26.44 40.4,26 40.4,25.5 ; v2(50.02,20.46) 50.11,20.37 65.076,20.37 66.021,21.315 66.021,24.24 66.025,24.245 ; R3.2@51.05,35.8 R4.2@51.05,32.44 50.01,31.4 43.5,31.4 36.438,31.4 ; C3.1@82.95,6.65 82.95,11.2 ; C1.1@82.95,13.656 82.95,11.2 ; C7.1@82.95,86.35 82.95,90.9 ; C5.1@82.95,93.356 82.95,90.9 ; C3.1@82.975,6.687 83.013,6.687 87.85,1.85 ; C7.1@82.975,86.387 83.013,86.387 86.9,82.5 91.1,82.5 92.7,82.5 ; D1.1@85.4,11.206 82.956,11.206 82.95,11.2 ; D5.1@85.4,90.906 82.956,90.906 82.95,90.9 ; 87.85,1.8 91.1,1.8 ; D4.1@91.1,4.2 91.1,1.8 ; D6.1@91.1,90.95 92.7,89.35 92.7,82.5 ; D2.1@91.253,10.847 92.3,9.8 92.3,1.8 ; C2.1@98.95,13.656 C4.1@98.95,6.65 98.95,3.922 96.828,1.8 92.7,1.8 92.3,1.8 ; C8.1@98.95,86.35 C6.1@98.95,93.356 ; C8.1@98.95,86.4 98.95,83.35 98.1,82.5 92.7,82.5 ; 11.5,2.7 12.9,2.7 ; 11.5,82.4 12.9,82.4 ; 36.438,29.7 36.438,27.79 36.459,27.79 36.869,27.38 36.869,25.9 36.459,25.49 36.438,25.49 C17.2@36.438,24.2 38.1,24.2 39.4,25.5 40.4,25.5 ; 36.438,29.7 36.438,31.4 ; 36.438,31.4 36.438,32.5 ; 91.1,1.8 92.3,1.8
  Top Layer w2: v3(2.002,49.96) 3.36,49.96 5.6,52.2 5.6,83 ; pad.8@40.399,38.4 40.399,39.247 cw(c42.939,39.247) 41.143,41.043 46.5,46.4 ; v3(50.04,2.028) 50.04,3.54 52,5.5 76.1,5.5 77.4,4.2 D3.1@85.4,4.2 ; D8.1@91.1,83.95 91.1,82.5 91.1,58.6 ccw(c92.307,58.6) 91.454,57.746 94.156,55.044 cw(c92.36,53.248) 94.9,53.248 94.9,51.807 ccw(c96.607,51.807) 95.4,50.6 ccw(c96.751,51.951) 96.751,50.04 v3(97.998,50.04) ; v2(54.709,50.1) ccw(c49.8,50.1) v2(54.709,50.1)
  Bottom Layer w2: v3(2.002,49.96) 5,49.96 ; v2@44.6,50 15,49.96 ; v3(49.96,97.972) 49.964,97.968 49.964,95.08 ; v2@50,44.9 50.033,20.46 50.04,15 ; v2@50,55.3 50,84.8 ; v3(50.04,2.028) 50.04,5 ; v2@55,50.038 84.8,50 ; 95.06,50.04 v3(97.998,50.04) ; 5,49.96 cw(c10,50) 15,50 cw(c10,50) 15,49.96 ; 5,49.96 ccw(c10,50) 15,49.96 ; 50.04,5 cw(c50,10) 50.04,15 ; 50.04,5 ccw(c50,10) 55,10 ccw(c50,10) 50.04,15 ; v2@54.8,50.1 ccw(c49.8,50.1) v2@54.8,50.1 ; 55,90 ccw(c50,90) 55,90 ; 95,50 ccw(c90,50) 95,50
  other v2: 50,45.2 44.9,50.1 49.9,55
pads on no net: U1.7 U1.9 U1.10 U1.13 U1.14 U1.15 U1.16 U1.20 U1.21 U1.22 U3.4
copper on no net: | length 88
  Top Layer w0.254: 13.5,50 ccw(c10,50) 13.5,50 ; 53.5,10 ccw(c50,10) 53.5,10 ; 53.5,90 ccw(c50,90) 53.5,90 ; 93.5,50 ccw(c90,50) 93.5,50

## Polygon pours and split planes (outlines as drawn)
GND on Bottom Layer "GND_BTM_PLYGN" (solid, remove dead copper, pour order 0): -0.2,100.2 -0.2,-0.2 100.2,-0.2 100.2,100.2
GND on Top Layer "GND_TP_PLYGN" (solid, remove dead copper, pour order 2): -0.2,100.2 -0.2,-0.2 100.2,-0.2 100.2,100.2

## Other copper
Top Layer:
  region net DIN: 76.26,19.2 76.26,18.586 ccw(c78.8,18.586) 77.004,16.79 77.077,16.717 ccw(c78.685,18.325) 78.685,16.051 79.169,16.051 79.169,15.944 cw(c79.016,15.944) 79.124,15.837 ccw(c79.166,15.795) 79.107,15.795 79.107,15.648 76.406,15.648 ccw(c76.406,14.537) 75.621,15.322 75.11,14.812 cw(c73.314,16.608) 73.314,14.068 73.08,14.068 cw(c75.595,14.068) 73.817,15.846 74.924,16.953
  region net DOUT: 24.6,45.6 23.566,45.6 cw(c23.566,46.966) 22.6,46 cw(c23.953,47.353) 22.04,47.353 22.04,46.103 cw(c20.197,46.103) 21.5,44.8 cw(c21.983,44.317) 21.983,45 24.4,45
  region net GND: 60.825,31.985 ccw(c61.048,31.762) 60.733,31.762 60.733,31.753 ccw(c60.579,31.753) 60.688,31.861 60.674,31.875 60.755,31.956 cw(c60.825,31.886)
  region net 3.3: 65.015,31.565 65.015,31.567 65.158,31.71 65.155,31.714 cw(c64.951,31.84) 64.951,31.661 64.92,31.661 64.92,31.66

## Silkscreen, mask and mechanical layers (free items; w line width, h text height)
Top Overlay:
  circle w1: c50,90 r2.7
  circle w0.254: c49.8,50.1 r3.5
  circle w0.254: c90,50 r3.5
  circle w0.254: c10,50.024 r3.5
  circle w0.254: c50,10 r3.5
  circle w0.254: c49.8,50.1 r3.5
  circle w0.254: c50,90 r3.5
  circle w1: c49.8,50.1 r2.7
  circle w1: c50,10 r2.7
  circle w1: c10,50 r2.7
  circle w1: c90,50 r2.7
  lines w0.127: 30.085,76.233 30.213,75.543 31.096,75.839 31.1,76.233 ; 30.087,76.191 cw(c30.593,76.233) 31.098,76.182 ; 29.394,69.788 cw(c31.601,72.428) 29.913,75.427 ccw(c32.5,72.5) 30.256,69.303 cw(c31.918,73.269) 29.394,69.788 ; 30.144,71.614 cw(c33.068,72.141) 32.497,75.056 ccw(c34.576,75.587) 32.961,74.175 ccw(c32.807,71.515) 30.144,71.614 ; 30.737,69.134 ccw(c28.524,70.827) 31.227,71.498 ccw(c31.9,75.05) 31.845,71.435 cw(c29.292,70.714) 31.326,69.01 cw(c31.918,73.269) 30.737,69.134 ; 31.733,75.907 cw(c31.516,71.936) 35.418,72.7 ccw(c32.633,73.221) 31.733,75.907 ; 31.932,68.969 ccw(c31.918,73.269) 32.56,69.017 ccw(c29.889,70.945) 33.109,71.643 cw(c31.9,75.05) 32.503,71.486 cw(c29.414,70.863) 31.932,68.969 ; 33.225,72.964 33.225,73.92 ccw(c34.576,75.587) 33.991,73.522 33.225,72.964 ; 33.507,69.273 ccw(c30.22,70.695) 33.606,71.863 ccw(c31.9,75.05) 34.099,72.18 cw(c29.997,70.576) 34.313,69.697 cw(c31.918,73.269) 33.507,69.273 ; 34.529,72.314 cw(c32.126,70.612) 35.07,70.675 cw(c37.087,69.432) 37.164,71.8 ccw(c35.485,70.204) 34.529,72.314
  lines w0.3: 0.35,0.35 99.65,0.35 99.65,99.65 0.35,99.65 0.35,0.35
  lines w0.5: 26.47,16.24 ccw(c27.74,16.24) 27.74,14.97 38.66,14.97 ; 26.5,16.14 26.5,41.83 cw(c27.77,41.83) 27.77,43.1 33.34,43.1 ; 26.5,22.149 26.5,23.8 ; 46.97,14.97 74.05,14.97 ccw(c74.05,16.24) 75.32,16.24 75.32,17.87 75.32,25.21 ; 70.96,43.08 74.05,43.08 cw(c74.05,41.81) 75.32,41.81 75.32,34.065
  text "OUTPUT" at 38.447,97.861 h1.3
  text "GND / VCC / DOUT" at 38.463,96.707 h3 r270
  text "AUTONOMUS TECHNOLOGIES / LABORATORY" at 42.431,67.514 h3
  text "DIN / VCC / GND" at 97.217,61.409 h3 r180
  text "INPUT" at 97.5,61.1 h1.3 r270
  text "PATTERN-GENERATOR-NODE V1.0 / E.Shaghaei@innopolis.university" at 28.887,60.344 h3
  text "DOUT" at 34.498,47.276 h3 r270
  text "GND" at 49.213,45.626 h3 r270
  text "VCC" at 39.402,45.6 h3 r270
  text "DIN" at 44.305,44.388 h3 r270
  text "<TESTPOINTS" at 52.116,41.6 h3
  text "OUTPUT" at 2.139,38.447 h1.3 r90
  text "GND / VCC / DOUT" at 3.293,38.463 h3
  text "CAUTION" at 0.473,31.545 h5.5
  text "GND / SWCLK / SWDIO / 3V3" at 75.7,27.6 h0.6
  text "HIGH-INTENSITY  / VISIBLE LIGHT /  EXPOSURE" at 0.881,22.968 h3.5
  text "CANL" at 39.404,15.805 h3 r270
  text "CANH" at 44.305,15.805 h3 r270
  text "Vcc / H / L / GND" at 33.052,7.01 h0.6 r90
  text "DIN / VCC / GND" at 61.228,2.747 h3 r90
  text "INPUT" at 60.919,2.464 h1.3 r180
Top Solder:
  region: 30.728,69.135 ccw(c31.91,73.269) 31.318,69.011 ccw(c29.283,70.714) 31.837,71.436 cw(c31.891,75.051) 31.219,71.499 cw(c28.515,70.827)
  region: 30.248,69.304 cw(c31.91,73.269) 29.385,69.789 cw(c31.592,72.429) 29.905,75.427 ccw(c32.491,72.501)
  region: 30.146,71.615 cw(c33.069,72.142) 32.499,75.057 ccw(c34.577,75.587) 32.962,74.176 ccw(c32.808,71.515)
  region: 30.213,75.543 30.094,76.187 cw(c30.092,76.192) 30.087,76.191 cw(c30.598,76.233) 31.111,76.233 cw(c31.106,76.233) 31.111,76.233 cw(c30.598,76.233) 31.111,76.223 31.111,76.233 ccw(c30.598,76.233) 31.111,76.233 31.111,76.223 31.107,75.84 ccw(c31.102,75.84) 31.107,75.84 cw(c31.102,75.84) 31.104,75.835 30.22,75.539 cw(c30.219,75.544)
  region: 31.924,68.97 ccw(c31.91,73.269) 32.551,69.018 ccw(c29.881,70.946) 33.1,71.644 cw(c31.891,75.051) 32.495,71.486 cw(c29.405,70.864)
  region: 33.499,69.274 ccw(c31.91,73.269) 34.304,69.698 ccw(c29.988,70.576) 34.09,72.181 cw(c31.891,75.051) 33.597,71.863 cw(c30.211,70.696)
  region: 35.061,70.676 ccw(c32.118,70.613) 34.52,72.314 cw(c35.477,70.205) 37.155,71.801 ccw(c37.078,69.433)
  region: 33.993,73.523 cw(c34.577,75.587) 33.227,73.921 33.227,72.964
  region: 35.43,72.701 ccw(c32.645,73.221) 31.745,75.908 cw(c31.527,71.937)
  text "AUTONOMUS TECHNOLOGIES / LABORATORY" at 42.431,67.514 h3
  text "PATTERN-GENERATOR-NODE V1.0 / E.Shaghaei@innopolis.university" at 28.887,60.344 h3
Mechanical 1:
  lines w0.5: 100,0 100,9.144
Mechanical 2:
  lines w0.5: 0,0 100,0 100,100 0,100 0,0
Mechanical 15:
  lines w0.5: 49.8,10.483 ccw(c50.483,10.483) 50,10

## Dimensions
89.75,89.85 to 85.403,10.177 on Top Overlay
10.1,84 to 89.843,83.803 on Top Overlay